# EAGLE board portal parkir bawah (EAGLE 9.6.2)
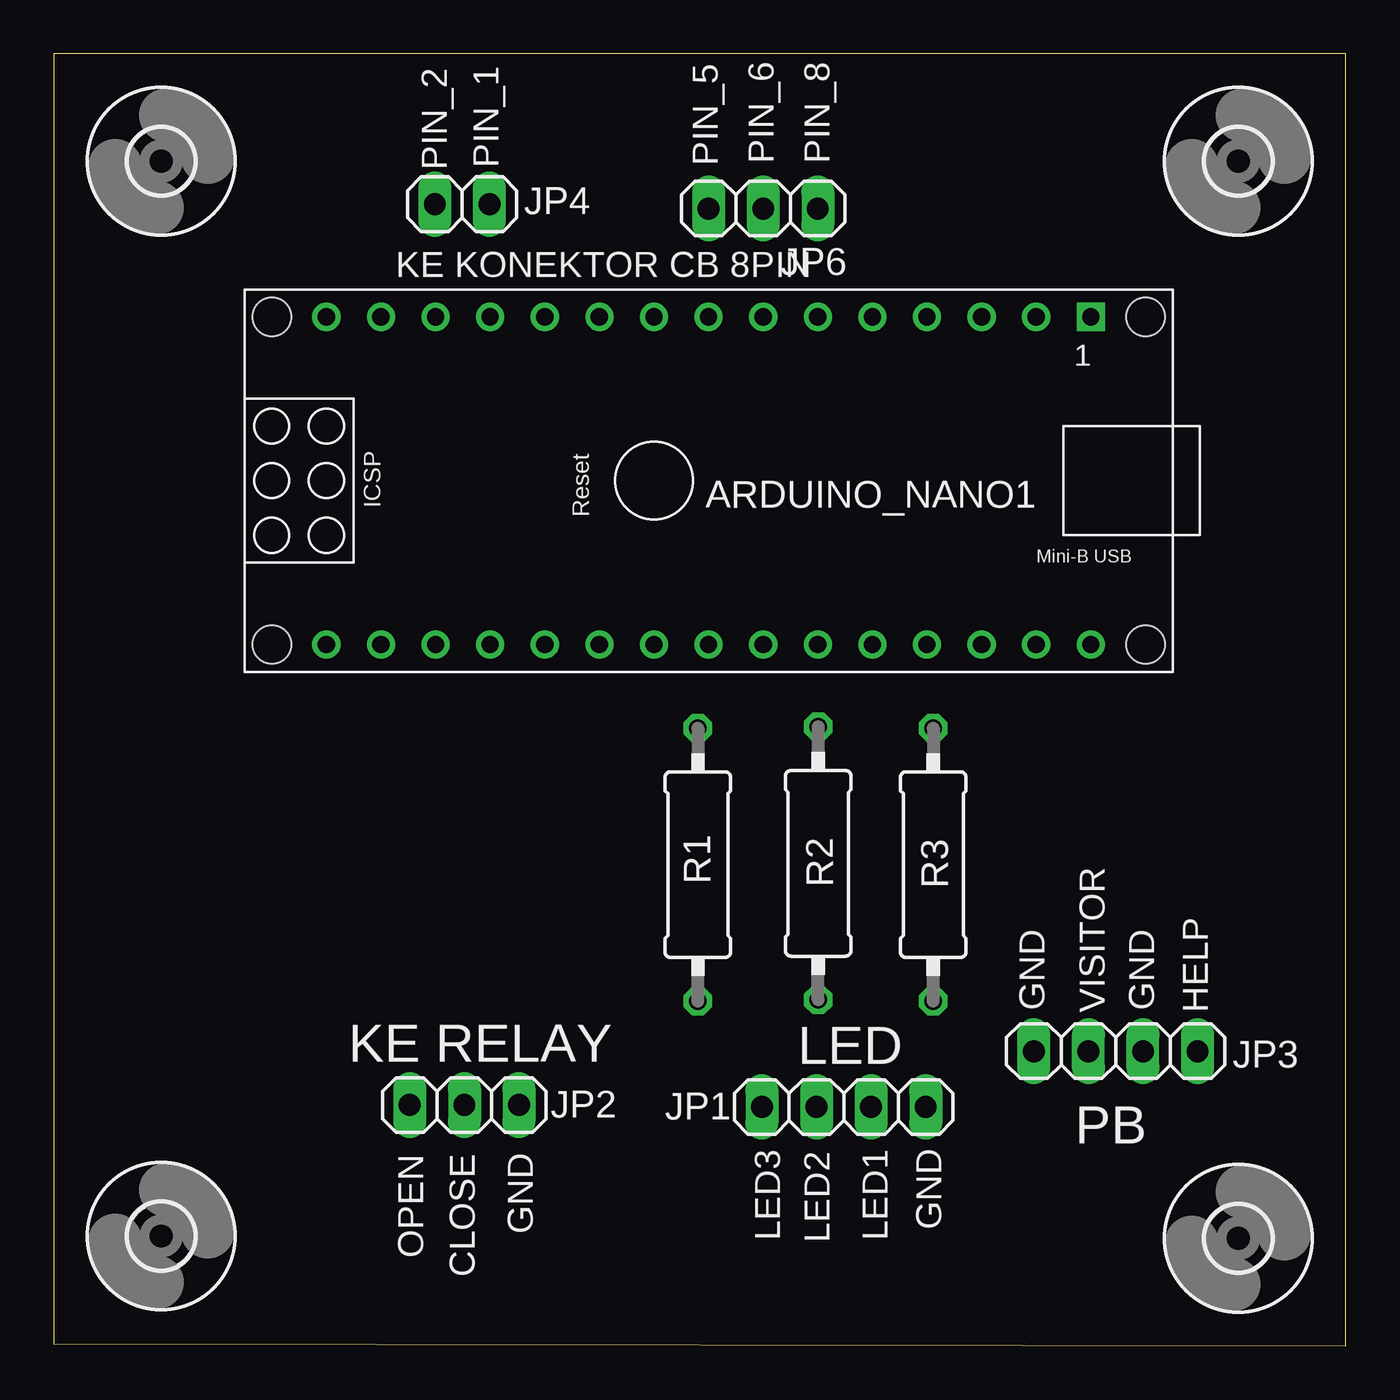
[diagram p0: board, top side]
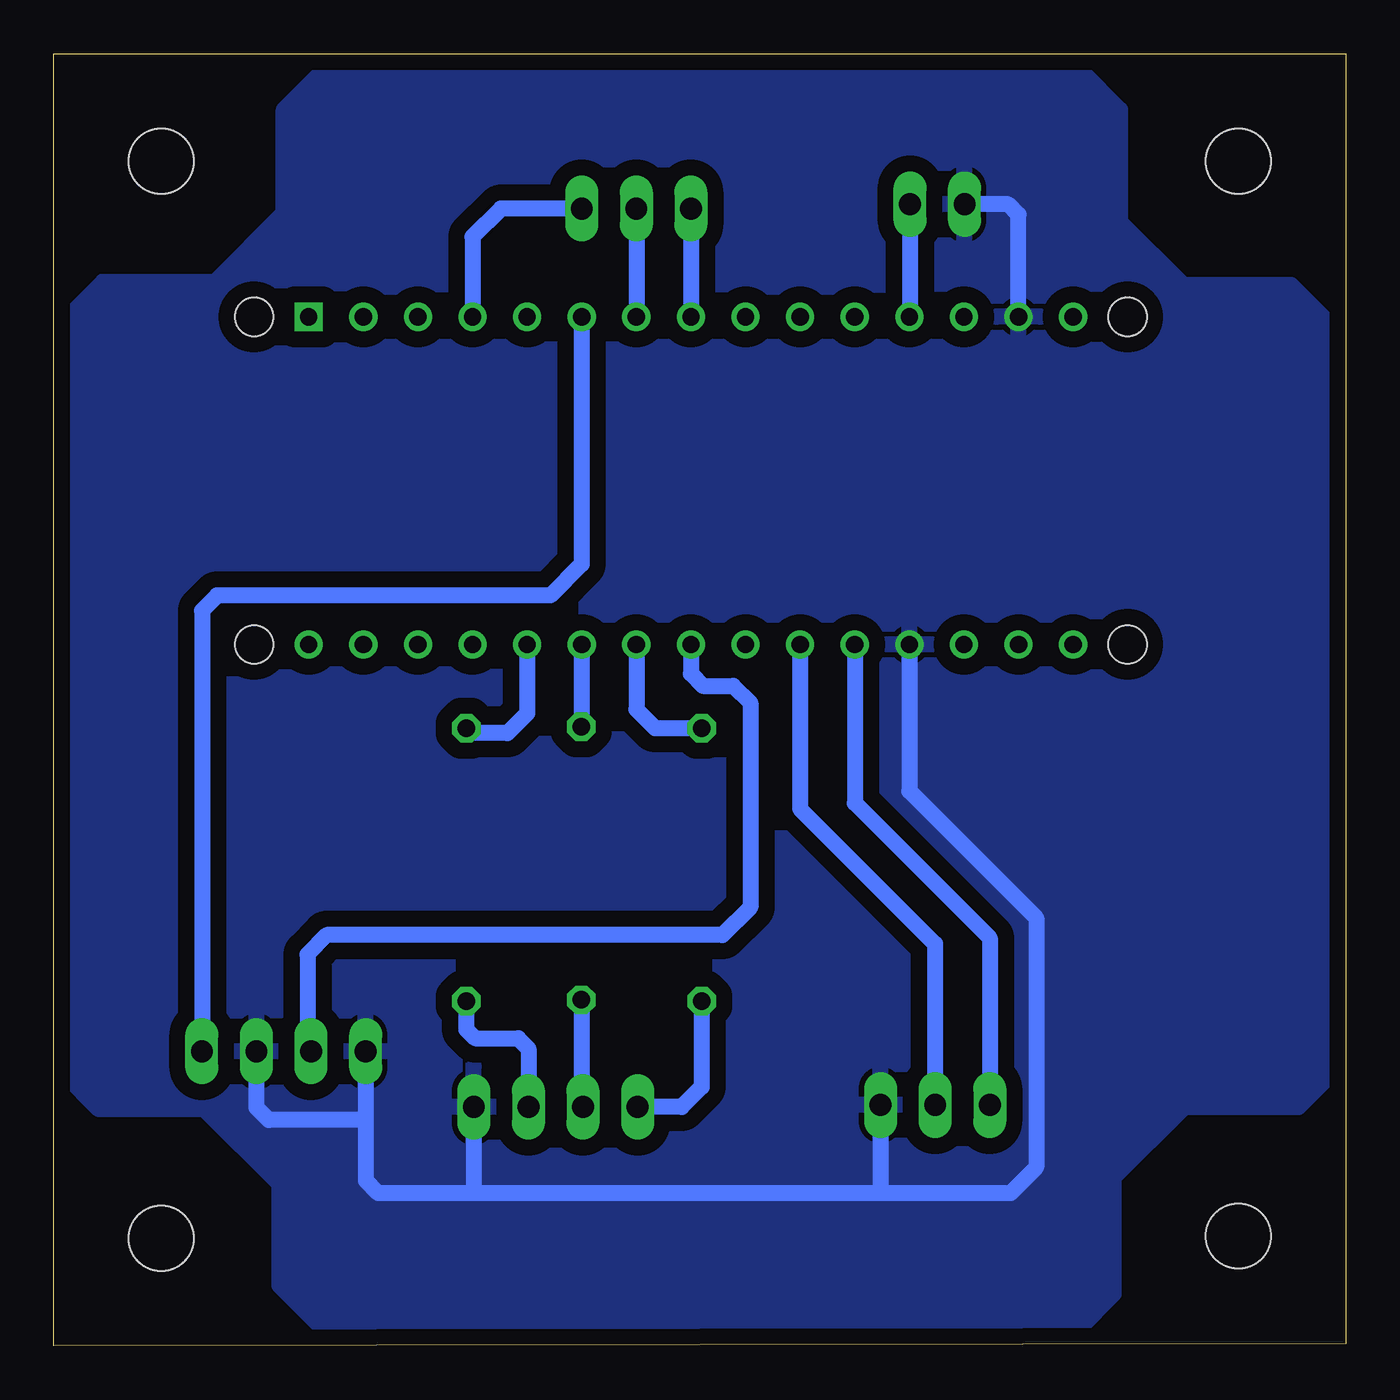
[diagram p1: board, bottom side, seen from below]

Size 60.1 x 60.1 mm. Coordinates in mm from the lower left corner, seen from the top.
Outline: 0,0.1 60.1,0 60.1,60.1 0,60.1 0,0.1
Copper layers (1*16): Top 0.035mm / dielectric 1.5mm / Bottom 0.035mm
Design rules "default": minimum track width 6mil, minimum drill 0.35mm, track to track 12mil, track to pad 12mil, pad to pad 12mil, via to via 6mil, smd to smd 12mil, copper to edge 24mil, drill to drill 6mil, minimum pad ring 10mil, minimum via ring 8mil, stop-mask expansion 4mil, vias tented up to drill 0mil, thermal gap 10mil

## Footprints (pad centres in the part's own frame; a part is rotated, then mirrored left to right if it is on the bottom)
ARDUINO_NANO = drill 0.8 square: 1 -20.32,-7.62 | drill 0.8: 2 -17.78,-7.62; 3 -15.24,-7.62; 4 -12.7,-7.62; 5 -10.16,-7.62; 6 -7.62,-7.62; 7 -5.08,-7.62; 8 -2.54,-7.62; 9 0,-7.62; 10 2.54,-7.62; 11 5.08,-7.62; 12 7.62,-7.62; 13 10.16,-7.62; 14 12.7,-7.62; 15 15.24,-7.62; 16 15.24,7.62; 17 12.7,7.62; 18 10.16,7.62; 19 7.62,7.62; 20 5.08,7.62; 21 2.54,7.62; 22 0,7.62; 23 -2.54,7.62; 24 -5.08,7.62; 25 -7.62,7.62; 26 -10.16,7.62; 27 -12.7,7.62; 28 -15.24,7.62; 29 -17.78,7.62; 30 -20.32,7.62 | hole 1.778: -22.86,-7.62; -22.86,7.62; 17.78,7.62; 17.78,-7.62
3,0 = hole 3: 0,0
1X04 = drill 1.016 long: 1 -3.81,0; 2 -1.27,0; 3 1.27,0; 4 3.81,0
1X03 = drill 1.016 long: 1 -2.54,0; 2 0,0; 3 2.54,0
1X02 = drill 1.016 long: 1 -1.27,0; 2 1.27,0
0309/12 = drill 0.813 octagon: 1 -6.35,0; 2 6.35,0

## Placement (x,y rotation side)
ARDUINO_NANO1  [ARDUINO_NANO]  27.92,40.24 180 top
H1  MOUNT-HOLE3.0  [3,0]  5,55.1 0 top
H2  MOUNT-HOLE3.0  [3,0]  55.1,55.1 0 top
H3  MOUNT-HOLE3.0  [3,0]  5,5.1 0 top
H4  MOUNT-HOLE3.0  [3,0]  55.1,5 0 top
JP1  [1X04]  36.75,11.11 180 top
JP2  [1X03]  19.1,11.2 180 top
JP3  [1X04]  49.4,13.7 0 top
JP4  [1X02]  19,53.1 0 top
JP6  [1X03]  33,52.9 180 top
R1  [0309/12]  29.96,22.38 90 top
R2  [0309/12]  35.56,22.44 90 top
R3  [0309/12]  40.91,22.38 90 top

## Library data of the parts
ARDUINO_NANO1 = ArduinoNanoV30
H1-H4 = holes
JP1-JP4 JP6 = pinhead
R1-R3 = rcl; SPICEPREFIX: R

## Nets
A0: ARDUINO_NANO1.4 JP6.1
A2: ARDUINO_NANO1.6 JP3.4
A3: ARDUINO_NANO1.7 JP6.2
A4: ARDUINO_NANO1.8 JP6.3
D2: ARDUINO_NANO1.20 JP2.3
D3: ARDUINO_NANO1.21 JP2.2
D4: ARDUINO_NANO1.22
D5: ARDUINO_NANO1.23 JP3.2
D6: ARDUINO_NANO1.24 R1.2
D7: ARDUINO_NANO1.25 R2.2
D8: ARDUINO_NANO1.26 R3.2
GND: ARDUINO_NANO1.14 ARDUINO_NANO1.19 JP1.1 JP2.1 JP3.1 JP3.3 JP4.1
N$1: JP1.2 R3.1
N$2: JP1.3 R2.1
N$3: JP1.4 R1.1
VCC: ARDUINO_NANO1.12 JP4.2
VIN: ARDUINO_NANO1.15

## Tracks (layer width: path | path; a pad name or v marks a point on that pad's centre or on a via)
A0
  Bottom 0.75: JP6.1 39.3,52.9 40.62,51.58 ARDUINO_NANO1.4
A2
  Bottom 0.75: ARDUINO_NANO1.6 35.54,36.36 37,34.9 52.5,34.9 53.2,34.2 JP3.4
A3
  Bottom 0.75: ARDUINO_NANO1.7 32.97,47.89 33,47.92 JP6.2
A4
  Bottom 0.75: 30.43,47.89 ARDUINO_NANO1.8 JP6.3
D2
  Bottom 0.75: ARDUINO_NANO1.20 22.84,25.24 16.56,18.96 JP2.3
D3
  Bottom 0.75: ARDUINO_NANO1.21 25.38,24.98 19.1,18.7 JP2.2
D5
  Bottom 0.75: ARDUINO_NANO1.23 30.46,31.26 29.9,30.7 28.5,30.7 27.7,29.9 27.7,20.4 29,19.1 47.4,19.1 48.3,18.2 48.3,13.87 JP3.2
D6
  Bottom 0.75: ARDUINO_NANO1.24 33,29.6 32.13,28.73 R1.2
D7
  Bottom 0.75: ARDUINO_NANO1.25 35.54,28.81 R2.2
D8
  Bottom 0.75: ARDUINO_NANO1.26 38.08,29.42 39,28.5 40.68,28.5 R3.2
GND
  Bottom 0.75: 24.1,7.1 40.5,7.1 | 40.5,7.1 45,7.1 45.59,7.69 45.59,10.6 | JP1.1 40.56,7.16 40.5,7.1 | ARDUINO_NANO1.19 20.3,25.8 14.4,19.9 14.4,8.3 15.6,7.1 21.5,7.1 | 21.5,7.1 24.19,7.1 | JP2.1 21.64,7.24 21.5,7.1 | ARDUINO_NANO1.14 15.22,52.62 15.7,53.1 JP4.1 | JP3.1 45.59,10.6 | 45.59,10.6 45.69,10.5 50.1,10.5 50.67,11.07 JP3.3
  pour Bottom (isolate 0.75): 0.5,12.8 2.2,11.1 7.5,11.1 10.8,7.8 10.8,2.4 12.4,0.8 47.6,0.8 49.6,2.8 49.6,7.5 53.1,11 58,11 59.6,12.6 59.6,47.7 57.8,49.5 52.6,49.5 49.4,52.7 49.4,57.5 47.6,59.3 12.3,59.3 10.5,57.5 10.5,52.3 7.55,49.35 2.55,49.35 0.6,47.4
N$1
  Bottom 0.75: R3.1 40.91,14.71 40.5,14.3 38.5,14.3 38.02,13.82 JP1.2
N$2
  Bottom 0.75: R2.1 35.56,11.19 JP1.3
N$3
  Bottom 0.75: R1.1 29.96,12.04 30.89,11.11 JP1.4
VCC
  Bottom 0.75: JP4.2 20.27,47.89 ARDUINO_NANO1.12

## Text on the board
tNames: PIN_2 | PIN_1 | PIN_5 | PIN_6 | PIN_8 | KE KONEKTOR CB 8PIN | GND | GND | VISITOR | HELP | KE RELAY | LED | PB | GND | LED3 | LED2 | LED1 | GND | OPEN | CLOSE